# Altium PCB Wenzel_REF.PCBDOC (part 4 of 7)
Units mm, origin at the board's own origin, x right, y up, seen from the top; angles counter-clockwise.
Board outline 222.63 x 100.1 mm, 4 copper layers (Top, L2, L3, Bot), stack 1.6 mm thick; 406 components, 236 nets, 1324 pads, 1362 vias.
Unrouted connection lines stored in the file: 1.
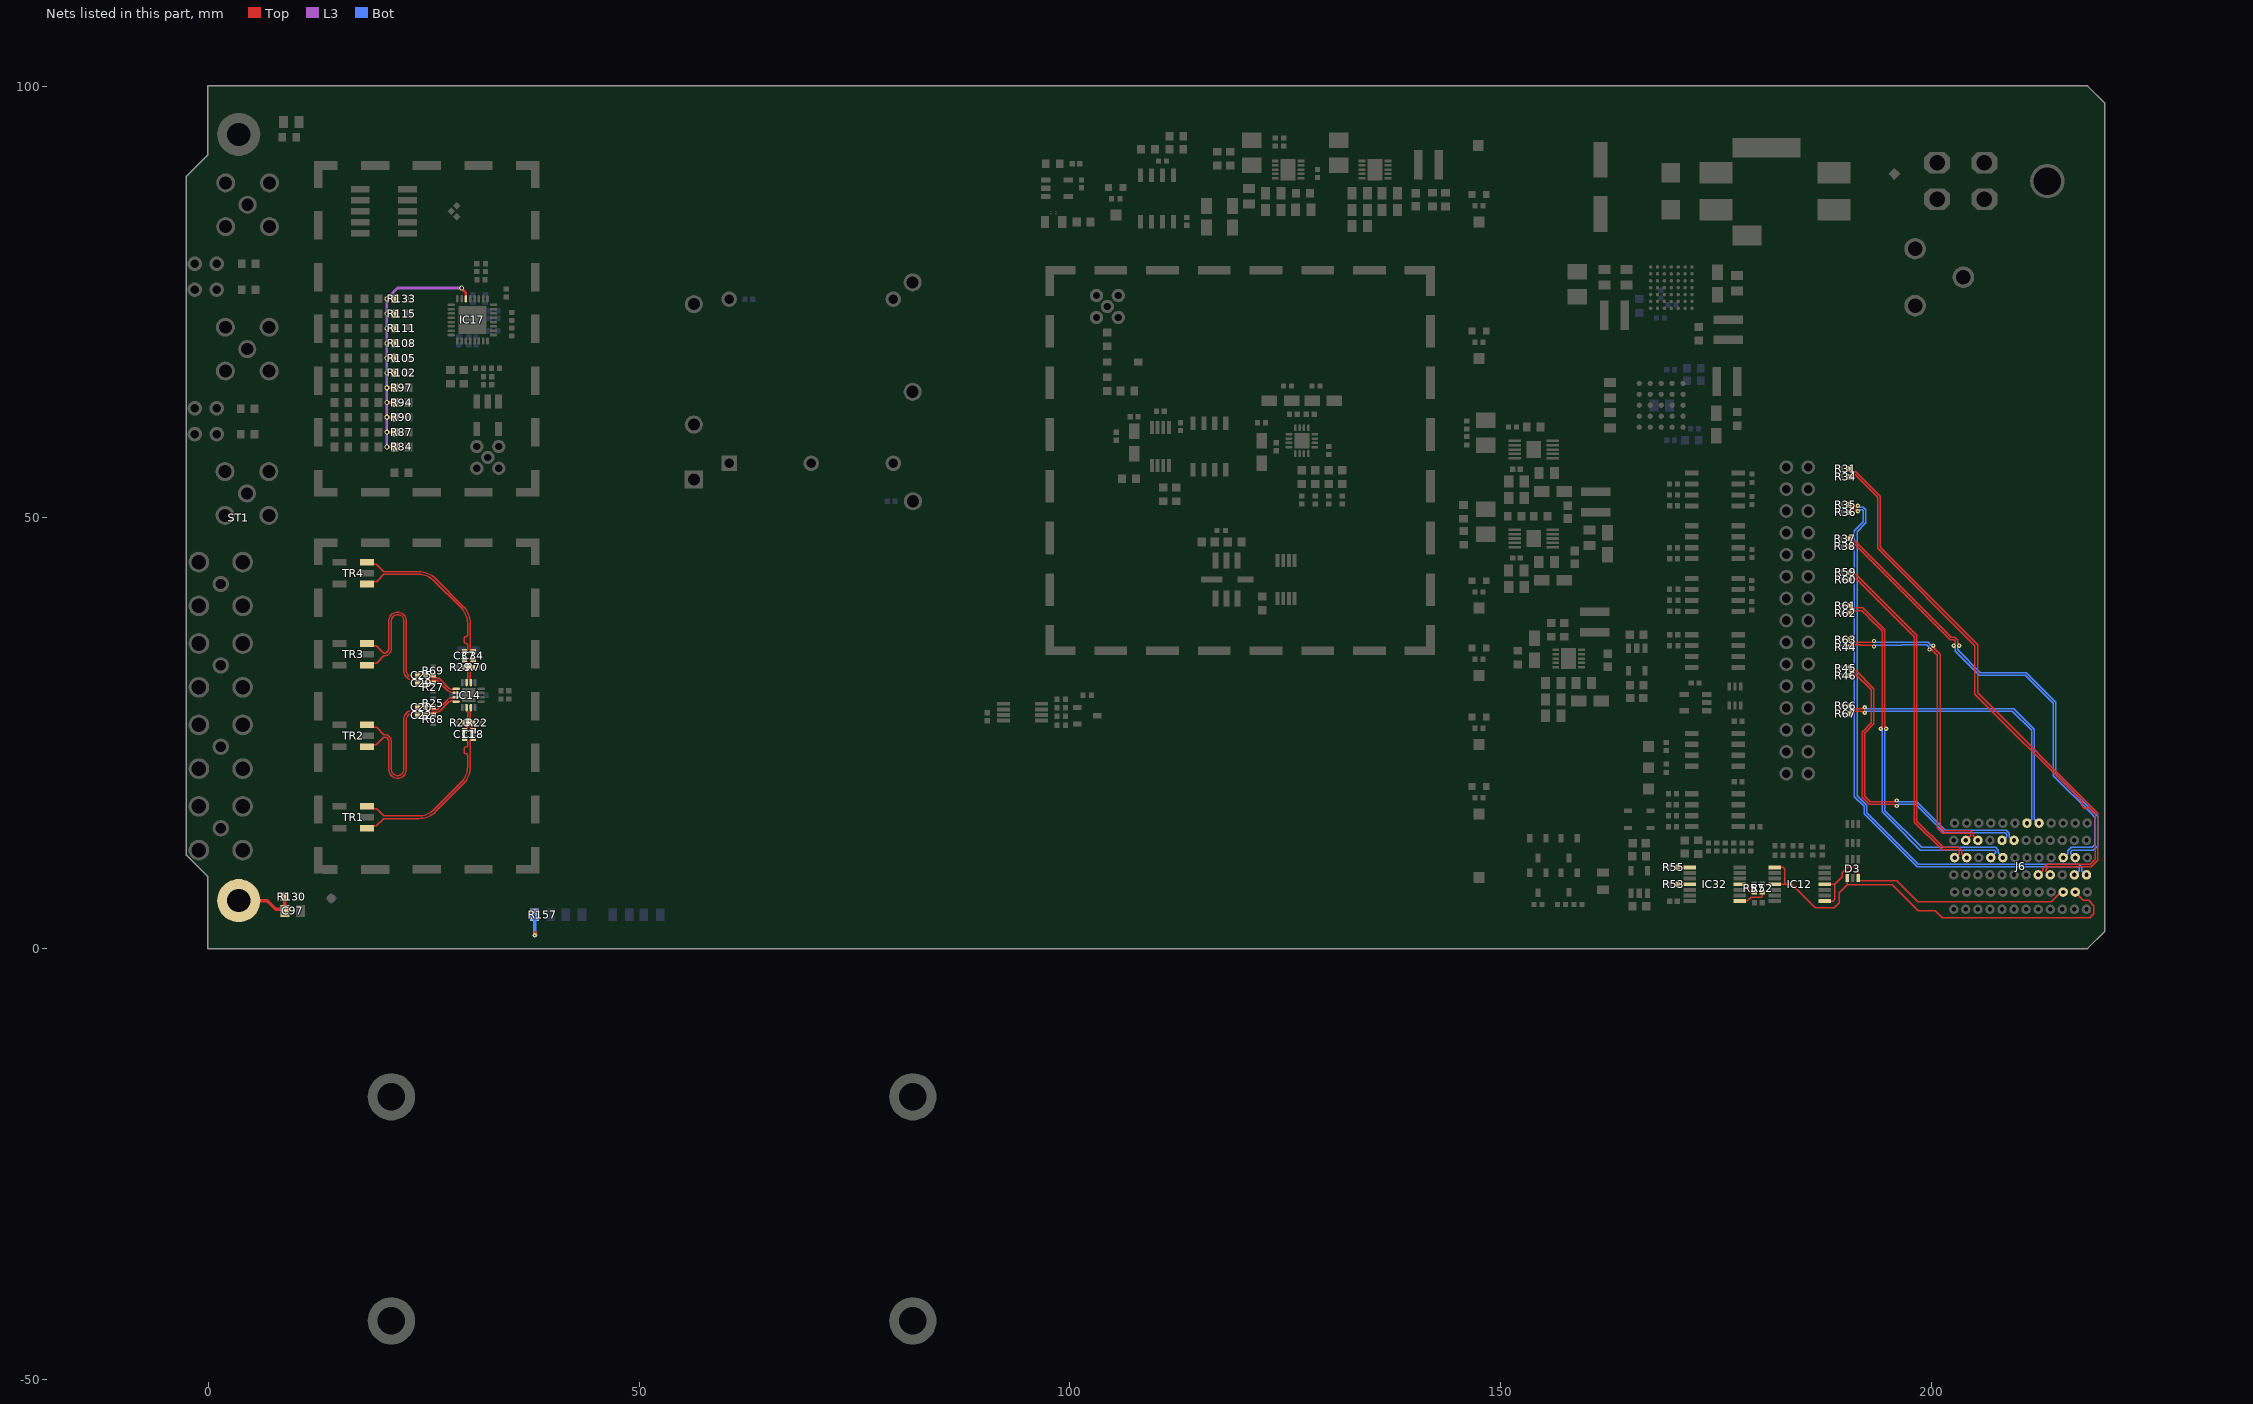
[diagram p4: the nets of this part, all layers, seen from the top]

## Via types
v1: diameter 0.5, hole 0.2, Top to Bot, tented both sides, 654 vias
v2: diameter 0.6, hole 0.3, Top to Bot, 478 vias
v3: diameter 0.5, hole 0.2, Top to Bot, 196 vias
v4: diameter 0.45, hole 0.2, Top to Bot, 34 vias

## Nets (pads, with @x,y where several pads share a name; then routed paths per layer and width w, separated by ;. In a path a pad name is that pad's centre, name@x,y a point inside that pad or via, vN(x,y) a via of type N, cw(c..) or ccw(c..) an arc to the next point about the centre after c; other vN are vias at no path point) (continued)
EEM_OUT3_N: (continued)
  Top w0.172: IC14.6@30.486,30.806 30.486,31.038 ccw(c30.298,31.038) 30.431,31.171 cw(c30.498,31.238) 30.403,31.238 30.403,33.031 cw(c30.686,33.031) 30.486,33.231 cw(c30.529,33.188) 30.529,33.25 C34.2@30.753,33.473
EEM_OUT3_P: C37.2 IC14.7 R29.1 | length 2.8
  Top w0.172: C37.2@29.753,33.473 29.977,33.25 cw(c29.977,33.188) 30.021,33.231 cw(c29.82,33.031) 30.104,33.031 30.104,31.233 ccw(c30.388,30.949) 29.986,30.949 IC14.7@29.986,30.806
EEM_OUT3C_N: C34.1 TR4.1 | length 18.9
  Top w0.172: TR4.1@18.43,44.79 18.694,44.526 19.523,44.526 20.38,43.67 24.413,43.67 cw(c24.413,40.838) 26.415,42.84 29.572,39.683 cw(c27.57,37.681) 30.402,37.681 30.402,34.725 ccw(c30.753,34.725) C34.1@30.753,34.373
EEM_OUT3C_P: C37.1 TR4.3 | length 18.9
  Top w0.172: TR4.3@18.43,42.25 18.694,42.514 19.54,42.514 20.396,43.37 24.409,43.37 cw(c24.409,40.83) 26.205,42.626 29.358,39.473 cw(c27.562,37.677) 30.102,37.677 30.102,37.166 30.102,36.307 cw(c29.93,36.307) 29.93,36.135 29.88,36.135 ccw(c29.88,35.98) 29.726,35.98 29.726,35.517 ccw(c29.88,35.517) 29.88,35.362 29.93,35.362 cw(c29.93,35.19) 30.102,35.19 30.102,34.833 30.102,34.722 cw(c29.753,34.722) C37.1@29.753,34.373

## Text inside footprints (layer, text, board x,y; h text height)
OSC2: TopOverlay "1" at 54.307,53.79 h1.2; TopOverlay "2" at 83.25,51.2 h1.2; TopOverlay "3" at 83.25,64.05 h1.2; TopOverlay "4" at 83.222,76.65 h1.2; TopOverlay "6" at 54.079,60.14 h1.2; TopOverlay "5" at 54.05,74.11 h1.2; Mechanical14 "4" at 83.222,76.65 h1.2; Mechanical14 "1" at 54.307,53.79 h1.2; Mechanical14 "2" at 83.25,51.2 h1.2; Mechanical14 "3" at 83.25,64.05 h1.2; Mechanical14 "6" at 54.079,60.14 h1.2; Mechanical14 "5" at 54.05,74.11 h1.2